# Altium PCB tmp235_Front_End_Siognal_Chain.PcbDoc
Units mil, origin at the board's own origin, x right, y up, seen from the top; angles counter-clockwise.
Board outline 2560 x 1180 mil, 4 copper layers (Top Layer, 3.3v, 5v, GND), stack 20.724 mil thick; 10 components, 11 nets, 51 pads, 27 vias.
Unrouted connection lines stored in the file: 20.
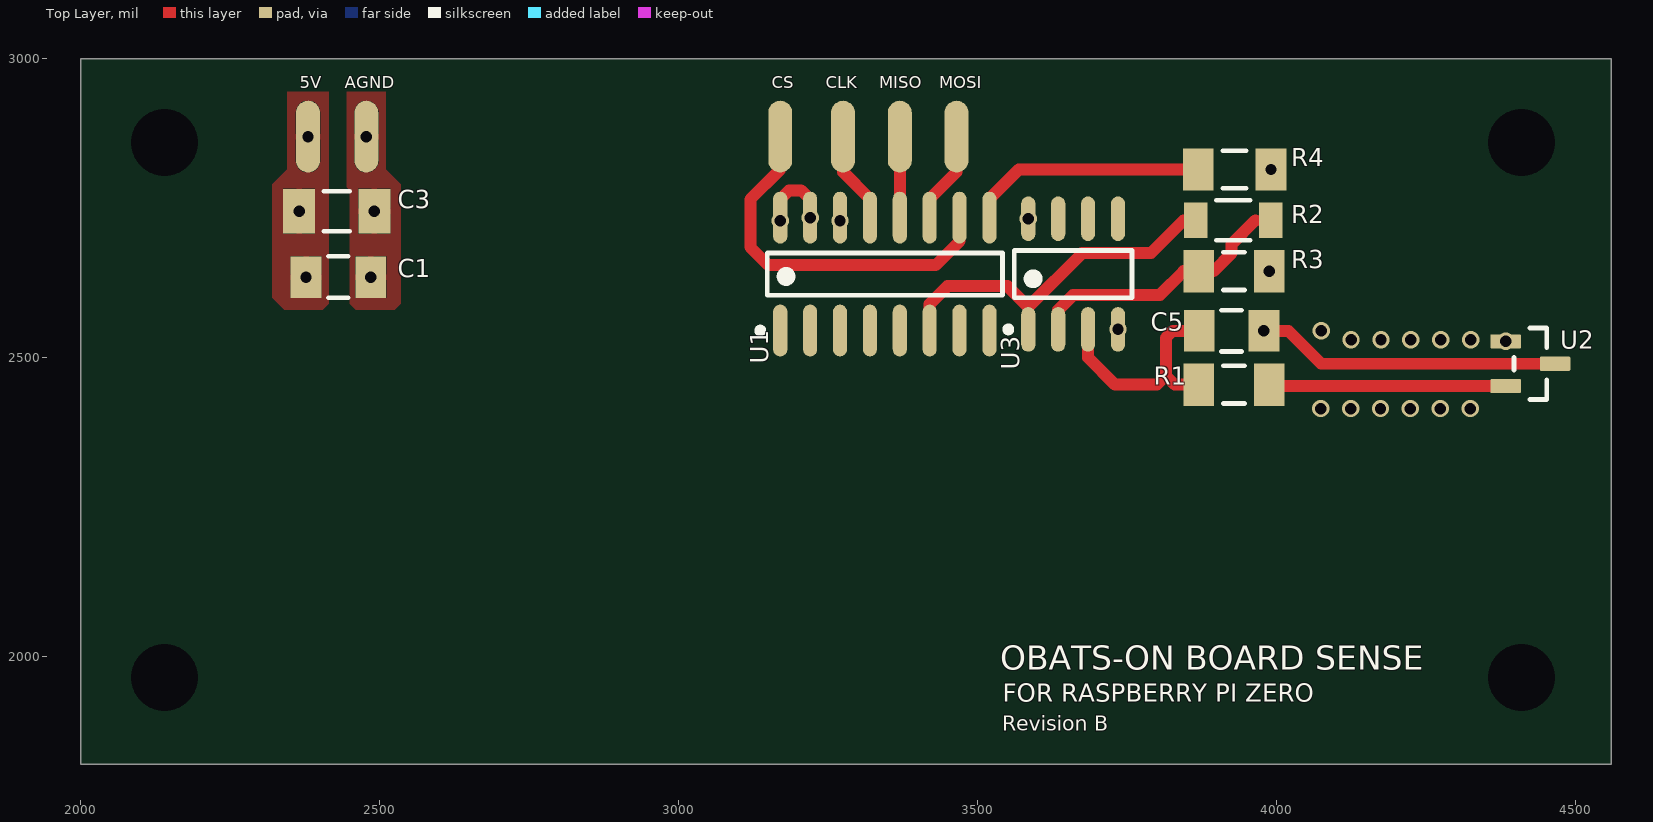
[diagram p0: Top Layer view]
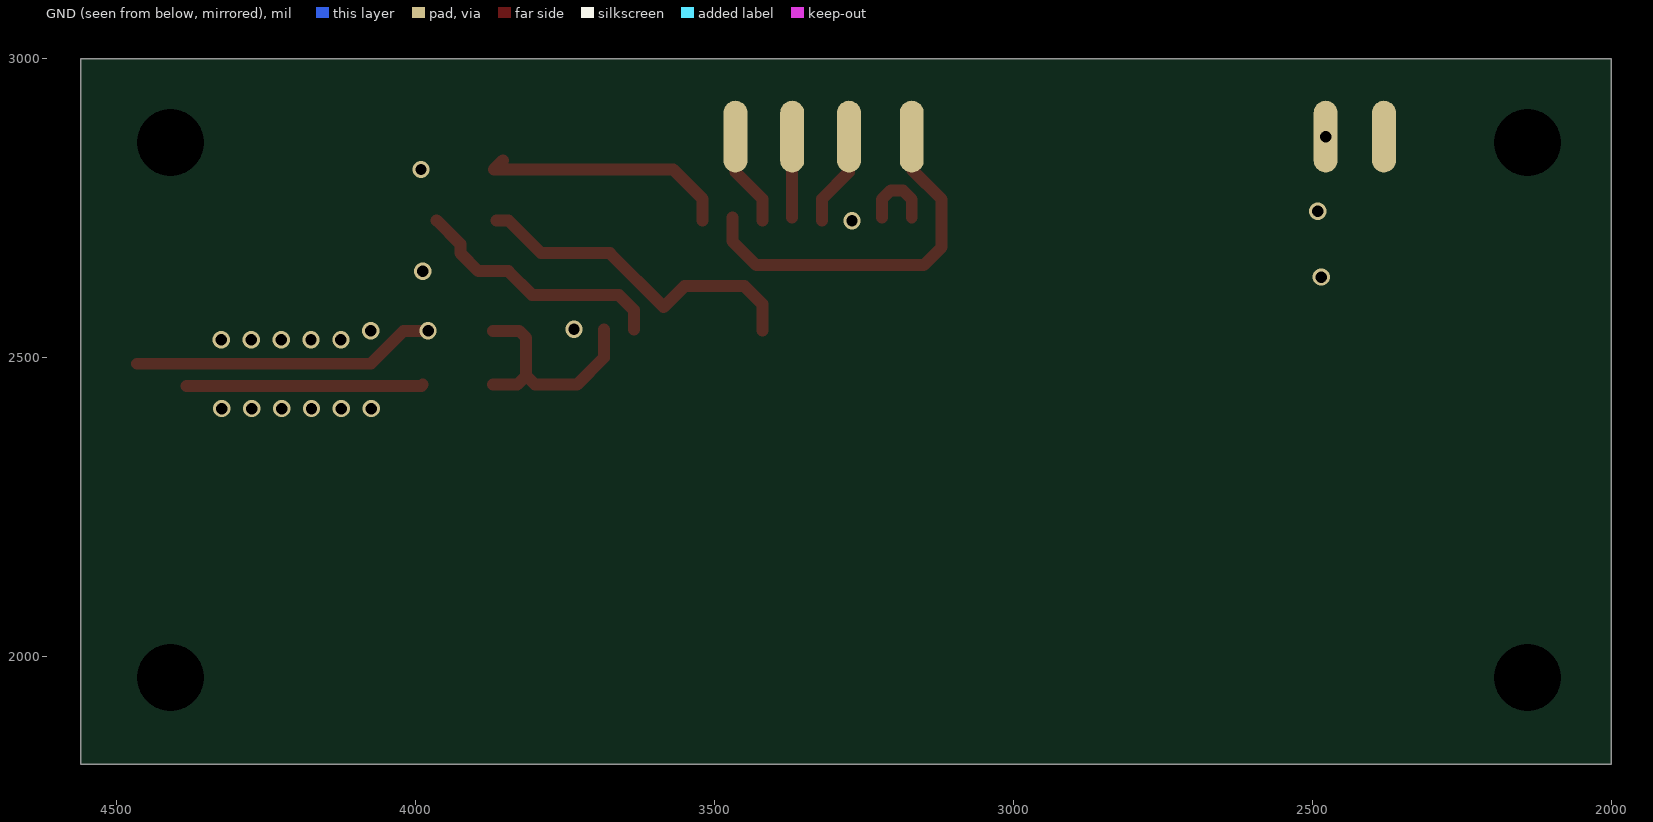
[diagram p1: GND view, seen from below]
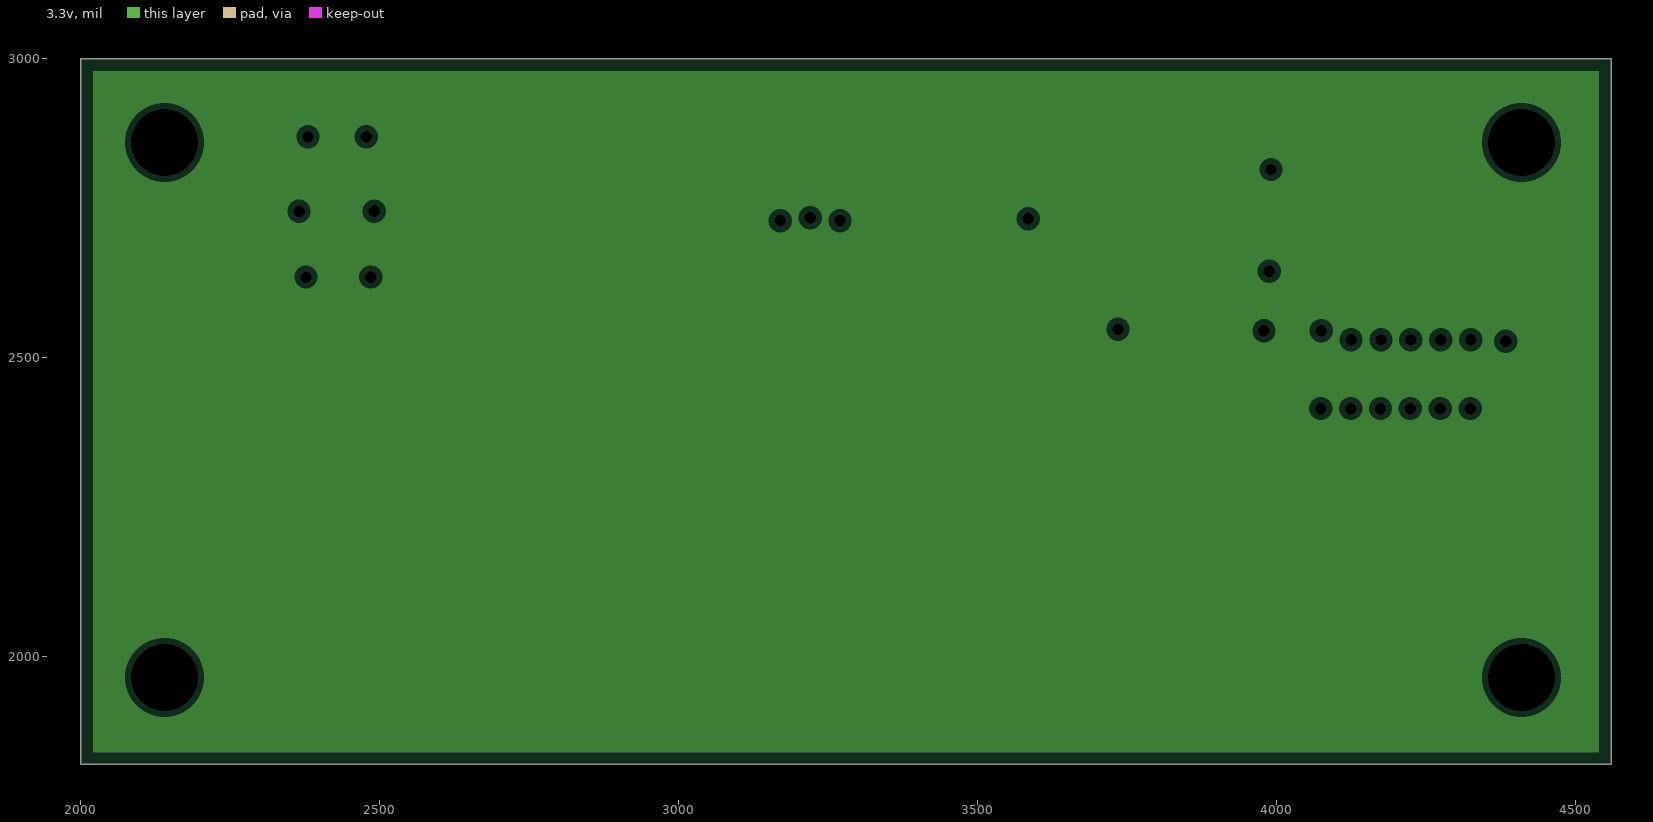
[diagram p2: 3.3v, clearances drawn from the general rule]
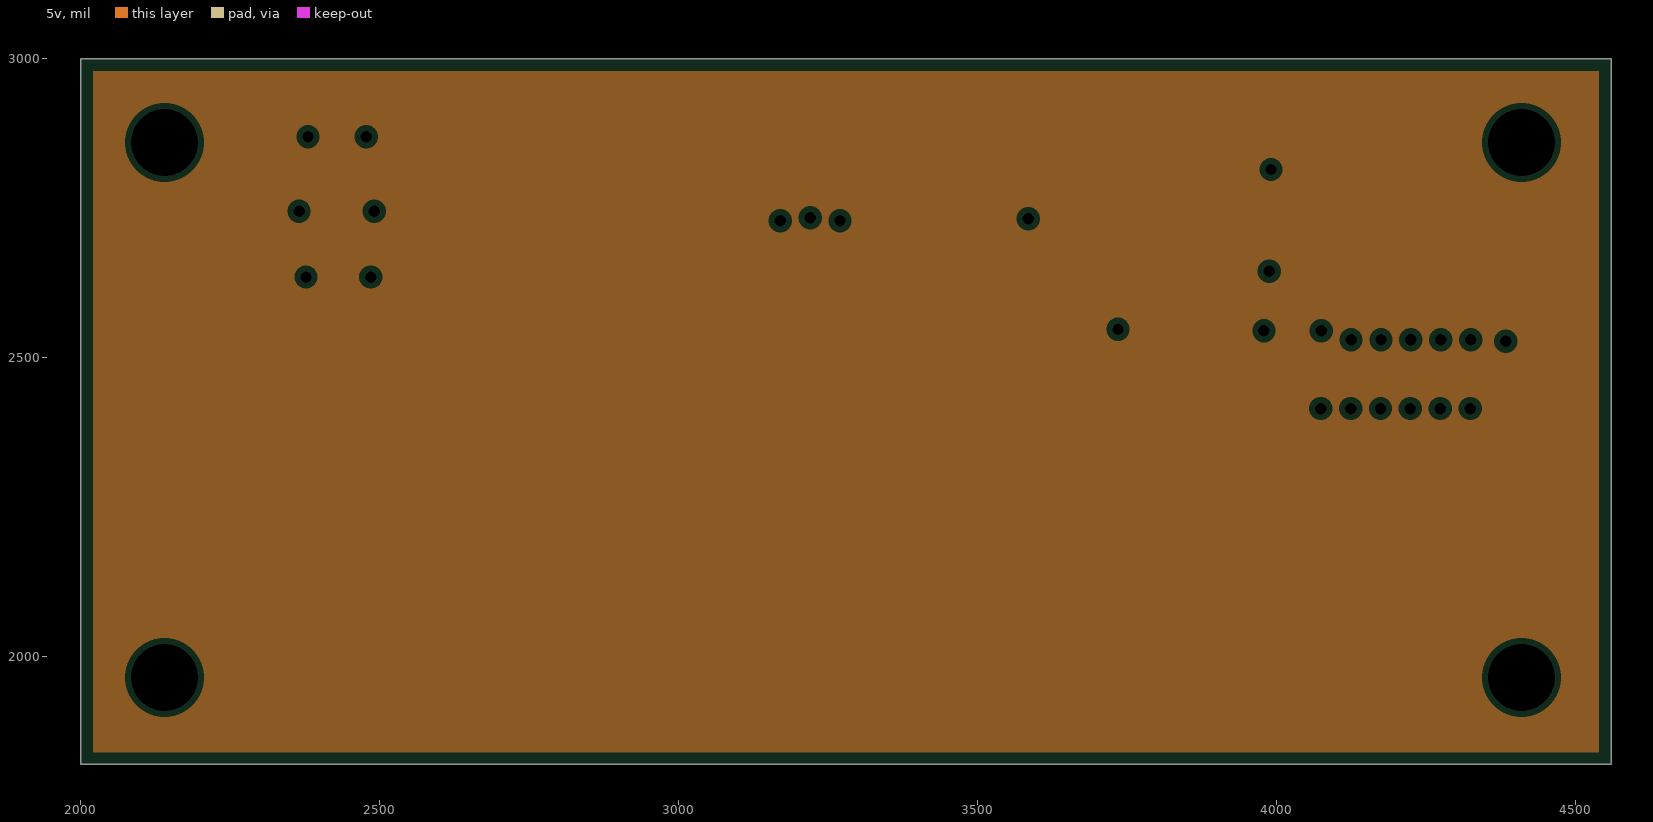
[diagram p3: 5v, clearances drawn from the general rule]

## Layer stack, top to bottom
Top Solder: solder mask 0.4, Solder Resist, Dk 3.5
Top Layer: signal copper 2.756
Dielectric 2: prepreg 2.8, PP-006, Dk 4.1
3.3v: plane copper 2.756
Dielectric 1: dielectric 4.1, FR-4, Dk 4.8
5v: plane copper 2.756
Dielectric 3: prepreg 2.8, PP-006, Dk 4.1
GND: signal copper 2.756
Bottom Solder: solder mask 0.4, Solder Resist, Dk 3.5

## Board outline
2000,3000 2000,1820 4560,1820 4560,3000

## Design rules (kind name [scope] priority, off if disabled: settings)
Clearance [All] p1: gap=10 ignorepadtopadclearanceinfootprint=FALSE except(0: Arc-Hole Track-Hole SMDPad-Hole THPad-Hole Via-Hole Fill-Hole Poly-Hole Region-Hole Text-Hole)
ComponentClearance [All] p1 off: gap=10 collisioncheckmode=3 verticalgap=10 showdistances=FALSE
Height [All] p1 off: minheight=0 maxheight=1000 prefheight=500
PlaneClearance [All] p1: clearance=10
PlaneConnect [All] p1: planeconnectstyle=Relief reliefexpansion=20 reliefentries=4 reliefconductorwidth=10 reliefairgap=10
PolygonConnect [All] p1 off: connectstyle=Relief reliefconductorwidth=10 reliefentries=4 polygonreliefangle="90 Angle" airgapwidth=10
RoomDefinition tmp235_Front_End_Siognal_Chain [InComponentClass('tmp235_Front_End_Siognal_Chain')] p1 off: confinementstyle=ConfineIn formatcopy=TRUE lockcomponents=FALSE outline 1905,1720 1970,1720 1970,1780 1905,1780
RoutingVias [All] p1: holewidth=19 width=29 viastyle="Through Hole" minholewidth=10 minwidth=20 maxholewidth=35 maxwidth=50
SolderMaskExpansion [All] p1: expansion=4 istentingtop=FALSE
Width [All] p1 off: maxlimit=10 minlimit=10 preferedwidth=10
26 further rules are at their usual default settings.

## Components (designator, comment, footprint, x,y, rotation, side; value= is the part's Value field where it differs from the comment)
C1 "1u" FP-CL31-IPC_B 2430.81,2635 r0 top
C3 "0.1u" CAPC1206(3216)130_M 2427.99,2745 r180 top value=100nF
C5 "1u" FP-CL31-IPC_B 3925,2545 r0 top
R1 "10K" RESC3116X65X45ML10T20 3929.06,2455 r180 top
R2 "6.8K" FP-AC1206-MFG 3927.99,2730 r180 top value=6.8KΩ
R3 "10K" RESC3116X65X45ML10T20 3929.06,2645 r180 top
R4 "10" RESC3216X60X45ML10T20 3930,2815 r180 top
U1 "MCP3008T-I/SL" SOIC-SL16_N 3345,2640 r90 top
U2 "TMP235A2DBZR" FP-DBZ0003A-MFG 4425,2490 r0 top
U3 "OP284ESZ" ADI-R-8_L 3660,2640 r90 top

## Footprints (in the part's own frame and the unit in brackets; to place one, negate y for a bottom-side part, rotate by r counter-clockwise, add the part's x,y. Pads: shape width x height; smd on the part's side, far side on the other; paste and mask are expansions set on the pad)
ADI-R-8_L [mm] "SOIC, 8-Leads, Body 4.9x3.9mm, Pitch 1.27mm, IPC High Density"
  oval 1.9x0.6 smd: 1(-2.35,1.905) 2(-2.35,0.635) 3(-2.35,-0.635) 4(-2.35,-1.905) 5(2.35,-1.905) 6(2.35,-0.635) 7(2.35,0.635) 8(2.35,1.905)
  silkscreen extent -2.47,-2.5 1,2.88, body extent -2,-2.5 2,2.5, height 1.75
CAPC1206(3216)130_M [mm] "Chip Capacitor, Body 3.2x1.6mm, Height 1.3mm, IPC Low Density"
  rect 1.35x1.9 smd: 1(-1.6,0) 2(1.6,0)
  silkscreen extent -0.55,-0.85 0.55,0.85, body extent -1.7,-0.9 1.7,0.9, height 1.3
FP-AC1206-MFG [mm]
  rect 1x1.5 smd paste+0 mask+0: 1(-1.6,0) 2(1.6,0)
  silkscreen extent -0.72,-0.85 0.72,0.85, body extent -2.2,-0.95 2.2,0.95, height 0.25
FP-CL31-IPC_B [mil]
  rect 51.4x69.22 smd paste+0 mask+0: 1(-54.19,0) 2(54.19,0)
  silkscreen extent -17,-35 17,35, body extent -90,-44 90,44, height 10
FP-DBZ0003A-MFG [mm]
  rrect17% 1.3x0.6 smd paste+0 mask+0: 1(-1.05,0.95) 2(-1.05,-0.95) 3(1.05,0)
  silkscreen extent -0.7,-1.52 0.7,1.52, body extent -1.8,-1.62 1.8,1.62, height 0.25
RESC3116X65X45ML10T20 [mm] "Chip Resistor, 2-Leads, Body 3.10x1.60mm, IPC Low Density"
  rect 1.3x1.8 smd: 1(-1.5,0) 2(1.5,0)
  silkscreen extent -0.45,-0.8 0.45,0.8, body extent -1.6,-0.85 1.6,0.85, height 0.65
RESC3216X60X45ML10T20 [mm] "Chip Resistor, 2-Leads, Body 3.20x1.60mm, IPC Low Density"
  rect 1.3x1.8 smd: 1(-1.55,0) 2(1.55,0)
  silkscreen extent -0.5,-0.8 0.5,0.8, body extent -1.65,-0.85 1.65,0.85, height 0.6
SOIC-SL16_N [mm] "SOIC, 16-Leads, Body 9.9x3.9mm, Pitch 1.27mm, IPC Medium Density"
  oval 2.2x0.6 smd: 1(-2.4,4.445) 2(-2.4,3.175) 3(-2.4,1.905) 4(-2.4,0.635) 5(-2.4,-0.635) 6(-2.4,-1.905) 7(-2.4,-3.175) 8(-2.4,-4.445) 9(2.4,-4.445) 10(2.4,-3.175) 11(2.4,-1.905) 12(2.4,-0.635) 13(2.4,0.635) 14(2.4,1.905) 15(2.4,3.175) 16(2.4,4.445)
  silkscreen extent -2.52,-5 0.9,5.42, body extent -2,-5 2,5, height 1.75

## Part data
C1 C5: library part CMP-13271-001662-1, "Cap Ceramic 1uF 50V X7R ±10% SMD 1206 +125°C Embossed T/R", Capacitance=1uF, Case Code (Imperial)=1206, Case Code (Metric)=3216, Dielectric=X7R, Max Operating Temperature=125°C, Min Operating Temperature=-55°C, Package Quantity=1, Tolerance=10%, Voltage=50V, Case/Package=1206, Contact Plating=Tin, Depth=1.6mm, Height=1.6mm, Lead Free="Lead Free", Length=3.2mm, Material=Ceramic, Mount="Surface Mount", Packaging="Tape and Reel", Radiation Hardening=No, Thickness=0.071inch, Voltage Rating=50V, Voltage Rating (DC)=50V, Width=0.063inch
C3: library part CMP-1037-04215-1, "CAP 100nF 100V ±20% 1206 (3216 Metric) Thickness 1.3mm SMD", Case-EIA=1206, Case-Metric=3216, Rated Voltage="100 V", Tolerance=Â±20%, Max Thickness="1.3 mm", Technology=SMT
R1 R3: library part CMP-2003-04910-1, Manufacturer=Yageo, Part Number=AC1206FR-0710KL
R2: library part CMP-03412-003637-1, "RES SMD 6.8K OHM 1% 1/4W 1206", Manufacturer=Yageo, Manufacturer Part Number=AC1206FR-076K8L, Package=AC1206, Power Rating=0.25W, Resistance=6.8KΩ, Temperature="-55°C to +155°C", Temperature Range High=+155°C, Temperature Range Low=-55°C, Tolerance=0.01, Voltage Rating=200V, Automotive=Yes, Automotive Grade="Grade 0", Category=Res, ComponentLink2Description=Datasheet, ComponentLink2URL=http://www.yageo.com/NewPortal/yageodocoutput?fileName=/pdf/R-Chip/PYu-AC_51_RoHS_L_6.pdf, Composition="Thick Film", Device Class L1="Passive Components", Device Class L2=Resistors, Device Class L3="Chip SMD Resistors", Digikey Description="RES SMD 6.8K OHM 1% 1/4W 1206", Footprint Url=http://www.yageo.com/exep/pages/download/literatures/PYu-R_Mount_10.pdf, Height=0.65mm, Ipc Land Pattern Name=RESC310160X55, Lead Free=Yes, Mouser Description="Thick Film Resistors - SMD 1/4W 6.8K ohm 1% AEC-Q200", Octopart=https://octopart.com/ac1206fr-076k8l-yageo-26041203, RoHS=TRUE, Series=AC
R4: library part CMP-2003-04815-1, Manufacturer="Vishay Dale", Part Number=CRCW120610R0FKEA
U1: library part CMP-0188-00351-2, "2.7V 4-Channel/8-Channel 10-Bit A/D Converters with SPI Serial Interface, 16-Pin SOIC 150mil, Industrial Temperature, Tape and Reel", Code_IPC=SOIC127P600-16, Code_JEDEC=MS-012-AC, ComponentLink1Description="Manufacturer URL", ComponentLink1URL=http://www.microchip.com/, ComponentLink2Description=Datasheet, ComponentLink2URL=http://ww1.microchip.com/downloads/en/DeviceDoc/21295d.pdf, ComponentLink3Description="Package Specification", ComponentLink3URL=http://www.microchip.com/stellent/groups/techpub_sg/documents/packagingspec/en012702.pdf, DatasheetVersion="revD, Dec-2008", PackageDescription="16-Lead Plastic Small Outline (SL) - Narrow, 3.90mm Body [SOIC]", PackageReference=SOIC-SL16, PackageVersion="revBB, Aug-2009", RevisionNote="URLs added."
U2: library part CMP-04948-000003-1, "LOW-POWER HIGH-ACCURACY ANALOG O", Ambient Temperature Range High=+150°C, Ambient Temperature Range Low=-40°C, Manufacturer="Texas Instruments", Max Supply Voltage=5.5V, Min Supply Voltage=2.3V, Operating Supply Current=9uA, Output Current=500uA, Package=DBZ0003A, Temperature="-40°C to +150°C", Accuracy=0.5%, Automotive=No, Category=IC, ComponentLink2Description=Datasheet, ComponentLink2URL=http://www.ti.com/lit/ds/symlink/tmp235.pdf, Device Class L1=Sensors, Device Class L2="Temperature and Humidity Sensors", Device Class L3=unset, Digikey Description="LOW-POWER HIGH-ACCURACY ANALOG O", Height=1.12mm, Lead Free=Yes, Manufacturer Part Number=TMP235A2DBZR, Max Junction Temp=+150°C, Mouser Description="±2°C Analog output temperature sensor, with 10mV /°C gain 3-SOT-23 -40 to 150", Octopart=https://octopart.com/tmp235a2dbzr-texas+instruments-94966376, RoHS=TRUE, Sensor Output="Analog Voltage", Standoff Height=0.01mm, Temperature Range High=+150°C, Temperature Range Low=-40°C
U3: library part CMP-0384-00701-1, "Double Channel Single-Supply Operation Operational Amplifier, 4.25 MHz BW, 4 V/us SR, Industrial, 8-pin SOIC (R-8), Tube", Amplifiers Per Package=2, Generic Part Number=OP284, Input Bias Current=80nA, Input Offset Voltage=175uV, Manufacturer="Analog Devices", Code_JEDEC=MS-012-AA, ComponentLink1Description="Manufacturer URL", ComponentLink1URL=http://www.analog.com/en/index.html, ComponentLink2Description=Datasheet, ComponentLink2URL=http://www.analog.com/static/imported-files/data_sheets/OP184_284_484.pdf, ComponentLink3Description="Package Specification", ComponentLink3URL=http://www.analog.com/static/imported-files/packages/PKG_PDF/SOIC_Narrow%20(R)/R_8.pdf, DatasheetVersion="Rev. J", Iq/Amp=2mA, Mounting Technology="Surface Mount", PackageDescription="8-Pin Standard Small Outline Package, Body 3.9 x 4.9 mm, Pitch 1.27 mm", PackageReference=R-8, PackageVersion=060506-A, PartNumber=OP284ESZ, Slew Rate=4V/us, Small Signal Bandwidth=4.25MHz, V Span Max=36V, V Span Min=3V

## Free pads (board coordinates)
  round 60 hole 112 unplated: 1(2140,2860) 1(4410,1965) 1(4410,2860) 2(2140,1965)
  oval 40x120 all layers, no hole: 4(2380,2870) 4(2477.5,2870) 4(3170,2870) 4(3275,2870) 4(3370,2870) 4(3465,2870)

## Via types
v1: diameter 29, hole 19, Top Layer to GND, 20 vias
v2: diameter 29, hole 19, Top Layer to 5v, 7 vias

## Nets (pads, with @x,y where several pads share a name; then routed paths per layer and width w, separated by ;. In a path a pad name is that pad's centre, name@x,y a point inside that pad or via, vN(x,y) a via of type N, cw(c..) or ccw(c..) an arc to the next point about the centre after c; other vN are vias at no path point)
+5V_P: C1.1 C3.2 pad.4@2380,2870 U1.15 U1.16 U2.1 U3.8 | length 123.5
  Top Layer w20: U1.16 3170,2765 3185,2780 3205,2780 3220,2765 v2(3220,2734.49)
  other v2: 4383.66,2527.4 2376.63,2635 3170,2729.49 3585,2732.52 2365,2745 2380,2870
AGND: C1.2 C3.1 C5.2 pad.4@2477.5,2870 R3.1 R4.1 U1.14 U2.3 U3.4 | length 509.9
  Top Layer w20: v1(3979.19,2545) 4020,2545 4075,2490 U2.3
  other v1: 4074.19,2415 4124.19,2415 4174.19,2415 4224.19,2415 4274.19,2415 4324.19,2415 4125,2530 4175,2530 4225,2530 4275,2530 4325,2530 4075,2545 3735,2547.48 2485,2635 3988.11,2645 3270,2729.49 2490.98,2745 3991.02,2815 2477.5,2870
CLK: pad.4@3275,2870 U1.13 | length 159.2
  Top Layer w20: pad.4@3275,2870 3275,2810.98 3320,2765.98 U1.13 U1.13@3320,2729.49
CS: pad.4@3170,2870 U1.10 | length 624.2
  Top Layer w20: pad.4@3170,2870 3170,2815 3120,2765 3120,2685 3150,2655 3430,2655 3470,2695 U1.10
DGND: R4.2 U1.9 | length 427
  Top Layer w20: U1.9@3520,2729.49 U1.9 3520,2765.98 3569.02,2815 R4.2 R4.2@3853.98,2830
MISO: pad.4@3370,2870 U1.12 | length 135.5
  Top Layer w20: U1.12 pad.4@3370,2870
MOSI: pad.4@3465,2870 U1.11 | length 159.2
  Top Layer w20: U1.11@3420,2729.49 U1.11 3420,2765.98 3465,2810.98 pad.4@3465,2870
NetC5_1: C5.1 R1.2 U3.3 | length 388.1
  Top Layer w20: U3.3 3685,2500 3730,2455 3800,2455 3815,2470 ; R1.2@3870.41,2455.41 R1.2 3830,2455 3815,2470 ; C5.1 3826.72,2545 3815,2533.28 3815,2470
NetR1_1: R1.1 U2.2 | length 396.5
  Top Layer w20: R1.1 3990.51,2452.6 U2.2
NetR2_1: R2.1 R3.2 U3.2 | length 433.4
  Top Layer w20: U3.2 3635,2580 3660,2605 3805,2605 3845,2645 R3.2 3895,2645 3925,2675 3925,2690 3965,2730
NetR2_2: R2.2 U1.6 U3.1 | length 576.5
  Top Layer w20: U1.6 3420,2590 3450,2620 3550,2620 3585,2585 3675.12,2675.12 3790.12,2675.12 3845,2730 R2.2
pads on no net: U1.1 U1.2 U1.3 U1.4 U1.5 U1.7 U1.8 U3.5 U3.6 U3.7

## Polygon pours and split planes (outlines as drawn)
+5V_P on Top Layer "+5V_P_L01_P045" (solid, pour order 45): 2415,2945 2345,2945 2345,2815 2320,2790 2320,2600 2340,2580 2405,2580 2415,2590
AGND on Top Layer "AGND_L01_P046" (solid, pour order 46): 2445,2945 2510,2945 2510,2815 2535,2790 2535,2590 2525,2580 2460,2580 2450,2590 2450,2780 2445,2785
no net on Top Layer "NONET_L01_P043" (solid, pour order 43): 2450,2935
no net on Top Layer "NONET_L01_P039" (solid, pour order 39): 2510,2935
no net on Top Layer "NONET_L01_P038" (solid, pour order 38): 3590,1970
no net on Top Layer "NONET_L01_P030" (solid, pour order 30): 4497.5,2872.5
no net on Top Layer "NONET_L01_P029" (solid, pour order 29): 1920,2210
no net on 3.3v (split plane): 4539.9,1840.1 2020.1,1840.1 2020.1,2979.9 4539.9,2979.9
no net on 5v (split plane): 4539.9,1840.1 2020.1,1840.1 2020.1,2979.9 4539.9,2979.9

## Silkscreen, mask and mechanical layers (free items; w line width, h text height)
Top Overlay:
  text "5V" at 2366,2951 h20
  text "AGND" at 2441,2951 h20
  text "CS" at 3156,2951 h20
  text "CLK" at 3246,2951 h20
  text "MISO" at 3336,2951 h20
  text "MOSI" at 3436,2951 h20
  text "OBATS-ON BOARD SENSE" at 3538,1978 h40
  text "FOR RASPBERRY PI ZERO" at 3542,1924.5 h30
  text "Revision B" at 3541,1876 h25